# Altium PCB EMG_MainBoard_Layout.PcbDoc (part 2 of 7)
Units mm, origin at the board's own origin, x right, y up, seen from the top; angles counter-clockwise.
Board outline 59.1 x 36 mm, 6 copper layers (L1 TOP, L2 GND, L3 SIGNAL, L4 GND, L5 POWER SIGNAL, L6 BOTTOM), stack 1.146 mm thick; 231 components, 136 nets, 812 pads, 470 vias.
Unrouted connection lines stored in the file: 570.
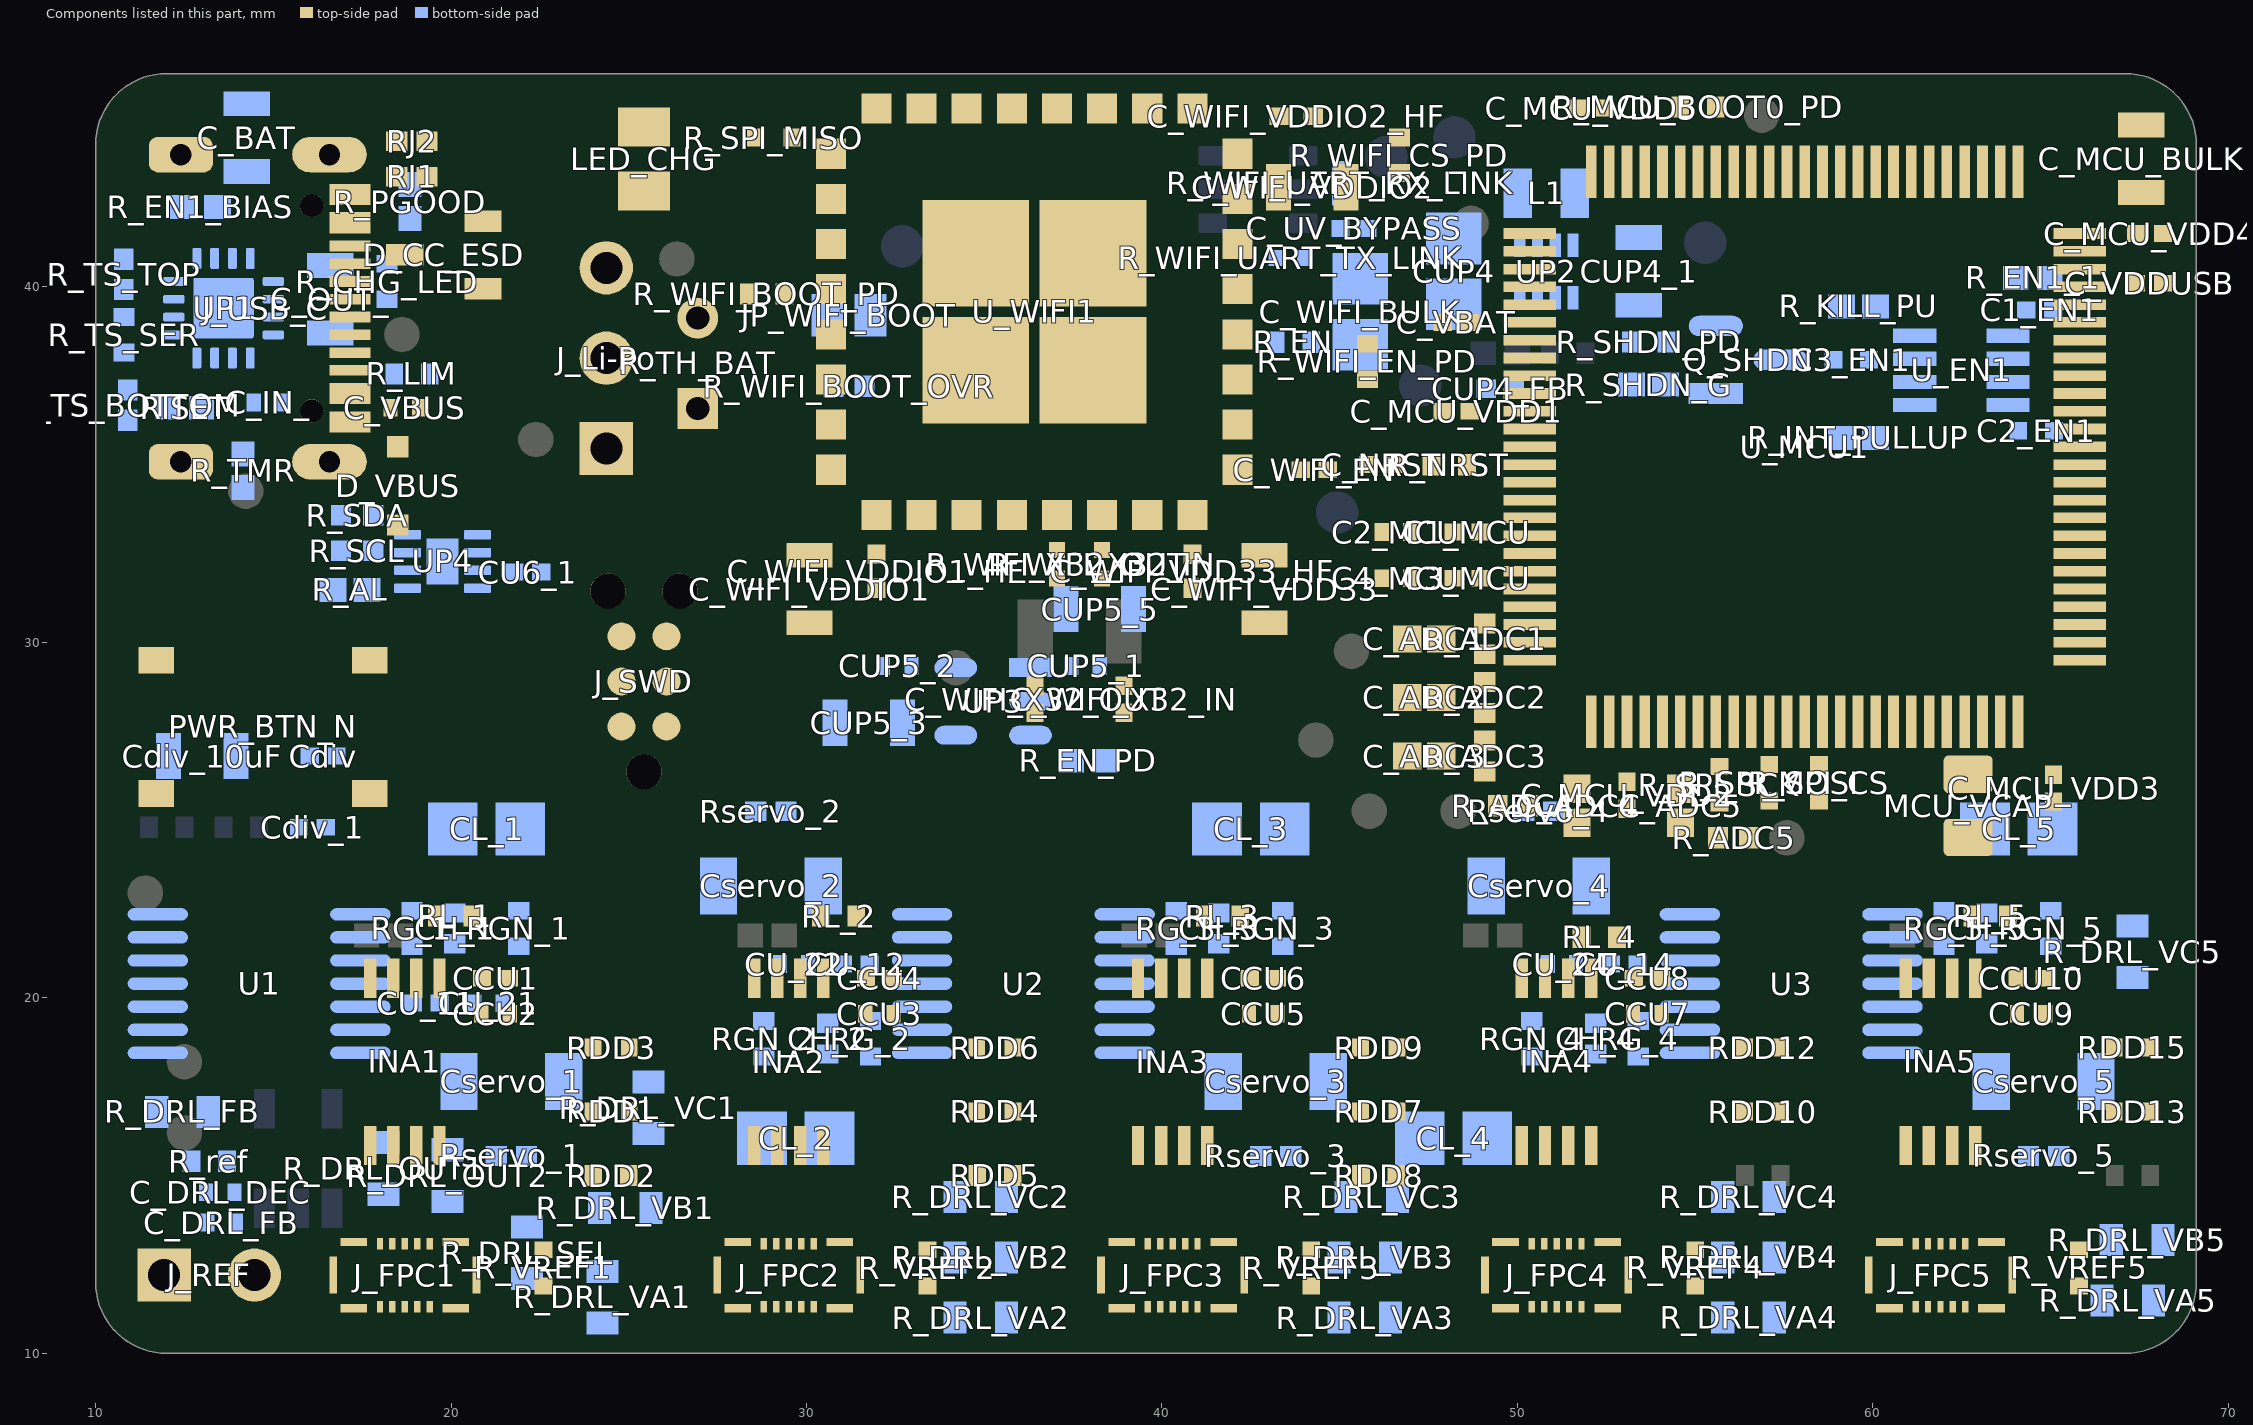
[diagram p6: the components of this part, seen from the top]

## Footprints (in the part's own frame and the unit in brackets; to place one, negate y for a bottom-side part, rotate by r counter-clockwise, add the part's x,y. Pads: shape width x height; smd on the part's side, far side on the other; paste and mask are expansions set on the pad) (continued)
FP-CRCW0402-e3-IPC_B [mm]
  rect 0.568x0.572 smd paste+0 mask+0: 1(-0.452,0) 2(0.452,0)
  body extent -0.5,-0.25 0.5,0.25, height 0.4
FP-DBV0005A-IPC_C [mm]
  rect 1.205x0.532 smd paste+0 mask+0: 1(-1.05,0.95)
  rrect100% 1.205x0.532 smd paste+0 mask+0: 2(-1.05,0) 3(-1.05,-0.95) 4(1.05,-0.95) 5(1.05,0.95)
  silkscreen extent -1.14,-1.45 0.05,2.03, body extent -1.4,-1.45 1.4,1.45, height 1.45
FP-DFE21CC_EL-MFG [mm]
  rect 0.8x1.4 smd paste+0 mask+0: 1(0.8,0) 2(-0.8,0)
  silkscreen extent 0,-0.7 0,0.7, body extent -1,-0.6 1,0.6, height 0.8
FP-GCM21B-0_2-e0_2_0_7-MFG [mm]
  rect 0.7x1.3 smd paste+0 mask+0: 1(-0.95,0) 2(0.95,0)
  silkscreen extent -0.23,-0.72 0.23,-0.72, body extent -1,-0.63 1,0.63, height 1.45
FP-GRM155-0_05-IPC_C [mm]
  rect 0.515x0.472 smd paste+0 mask+0: 1(-0.379,0) 2(0.379,0)
  body extent -0.5,-0.25 0.5,0.25, height 0.55
FP-GRM155-0_05-MFG [mm]
  rect 0.55x0.5 smd paste+0 mask+0: 1(-0.475,0) 2(0.475,0)
  silkscreen extent -0.5,-0.65 0.5,0.65, body extent -0.85,-0.38 0.85,0.38, height 0.25
FP-GRM155-0_15-IPC_A [mm]
  rect 0.804x0.758 smd paste+0 mask+0: 1(-0.477,0) 2(0.477,0)
  silkscreen extent -0.88,-0.78 0.88,0.78, body extent -1.08,-0.58 1.08,0.58, height 0.25
FP-GRM219-0_2-0_1-IPC_A [mm]
  rect 1.455x1.556 smd paste+0 mask+0: 1(-0.926,0) 2(0.926,0)
  silkscreen extent -1.65,-1.18 1.65,1.18, body extent -1,-0.63 1,0.63, height 0.95
FP-RC0402-0_4-IPC_A [mm]
  rect 0.715x0.672 smd paste+0 mask+0: 1(-0.479,0) 2(0.479,0)
  body extent -0.5,-0.25 0.5,0.25, height 0.4
FP-RT0402-MFG [mm]
  rect 0.5x0.6 smd paste+0 mask+0: 1(-0.5,0) 2(0.5,0)
  silkscreen extent -0.5,-0.71 0.5,0.7, body extent -0.85,-0.4 0.85,0.4, height 0.25
FP-SOD323-CA-MFG [mm]
  rect 0.6x0.6 smd paste-1000 mask+0: 1(-1.1,0) 2(1.1,0)
  silkscreen extent -0.43,-0.67 0.43,-0.67, body extent -1.53,-0.82 1.53,0.82, height 0.25
GCT_USB4105-GF-A-060 [mm]
  rect 0.6x1.15 smd mask+0.02: A1_B12(-3.2,4.755) B1_A12(3.2,4.755)
  rect 0.6x1.15 smd mask+0.04: A4_B9(-2.4,4.755) B4_A9(2.4,4.755)
  rect 0.3x1.15 smd mask+0.04: A5(-1.25,4.755) A6(-0.25,4.755) A7(0.25,4.755) A8(1.25,4.755) B5(1.75,4.755) B6(0.75,4.755) B7(-0.75,4.755) B8(-1.75,4.755)
  oval 1x2.1 hole 0.6 slot 1.7 at 90 deg: SH1(-4.32,4.18) SH2(4.32,4.18)
  rrect50% 1x1.8 hole 0.6 slot 1.4 at 90 deg: SH3(-4.32,0) SH4(4.32,0)
  round 0.65 hole 0.65 unplated: ""(-2.89,3.68) ""(2.89,3.68)
  silkscreen extent -4.47,1.4 4.47,2.65, body extent -4.47,-2.6 4.47,5.11, height 3.31
GRM31x [mm] "Murata GRM31CR71E335KA88L 3.3uF 25V X7R 1206; maximum component height 1.8mm; existing lands unchanged"
  rect 1.05x1.6 smd: 1(-1.475,0) 2(1.475,0)
  body extent -1.6,-0.8 1.6,0.8, height 1
HDR1X2 [mm] "Connector; Header; 2 Position"
  rect 1.5x1.5 hole 0.9: 1(0,0)
  round 1.5 hole 0.9: 2(2.54,0)
  silkscreen extent -1.27,-1.27 3.81,1.27
HDR1X3 [mm] "Connector; Header; 3 Position"
  rect 1.5x1.5 hole 0.9: 1(0,0)
  round 1.5 hole 0.9: 2(2.54,0) 3(5.08,0)
  silkscreen extent -1.27,-1.27 6.35,1.27
HIROSE_BK13C06-10DS/2-0.35V(895) [mm]
  rect 0.18x0.325 smd paste+0 mask+0.025: 1(-0.7,0.887) 2(-0.35,0.887) 3(0,0.887) 4(0.35,0.887) 5(0.7,0.887) 6(-0.7,-0.887) 7(-0.35,-0.887) 8(0,-0.887) 9(0.35,-0.887) 10(0.7,-0.887)
  rect 0.75x0.235 smd paste+0 mask+0.09: P1_1(-1.435,0.933) P1_3(-1.435,-0.933) P2_1(1.435,0.933) P2_3(1.435,-0.933)
  rect 0.215x1.04 smd paste+0 mask+0.09: P1_2(-2.015,0) P2_2(2.015,0)
  Keep-Out Layer region: 1.907,-0.815 0.79,-0.815 0.79,-0.725 -0.79,-0.725 -0.79,-0.815 -1.907,-0.815 -1.907,0.815 -0.79,0.815 -0.79,0.725 0.79,0.725 0.79,0.815 1.907,0.815
  silkscreen extent -0.78,1.5 -0.61,1.67
LEDC2012X120N [mm]
  rect 1.1x1.45 smd: A(0.9,0) C(-0.9,0)
  silkscreen extent -2.1,-0.1 -1.9,0.1, body extent -1,-0.65 1,0.65, height 0.9
LT-TS8-8-TSOT-23_V [mm] "SOT23, 8-Leads, Body 2.9x1.75mm, Pitch 0.65mm"
  rect 1.22x0.4 smd: 1(-1.31,0.975) 2(-1.31,0.325) 3(-1.31,-0.325) 4(-1.31,-0.975) 5(1.31,-0.975) 6(1.31,-0.325) 7(1.31,0.325) 8(1.31,0.975)
  silkscreen extent -2.6,-1.45 0.3,1.45, body extent -0.87,-1.45 0.88,1.45, height 1
QFP50P1600X1600X160-100N [mm]
  rect 1.475x0.3 smd mask+0.04: 1(-7.738,6) 2(-7.738,5.5) 3(-7.738,5) 4(-7.738,4.5) 5(-7.738,4) 6(-7.738,3.5) 7(-7.738,3) 8(-7.738,2.5) 9(-7.738,2) 10(-7.738,1.5) 11(-7.738,1) 12(-7.738,0.5) 13(-7.738,0) 14(-7.738,-0.5) 15(-7.738,-1) 16(-7.738,-1.5) 17(-7.738,-2) 18(-7.738,-2.5) 19(-7.738,-3) 20(-7.738,-3.5) 21(-7.738,-4) 22(-7.738,-4.5) 23(-7.738,-5) 24(-7.738,-5.5) 25(-7.738,-6) 51(7.738,-6) 52(7.738,-5.5) 53(7.738,-5) 54(7.738,-4.5) 55(7.738,-4) 56(7.738,-3.5) 57(7.738,-3) 58(7.738,-2.5) 59(7.738,-2) 60(7.738,-1.5) 61(7.738,-1) 62(7.738,-0.5) 63(7.738,0) 64(7.738,0.5) 65(7.738,1) 66(7.738,1.5) 67(7.738,2) 68(7.738,2.5) 69(7.738,3) 70(7.738,3.5) 71(7.738,4) 72(7.738,4.5) 73(7.738,5) 74(7.738,5.5) 75(7.738,6)
  rect 0.3x1.475 smd mask+0.04: 26(-6,-7.738) 27(-5.5,-7.738) 28(-5,-7.738) 29(-4.5,-7.738) 30(-4,-7.738) 31(-3.5,-7.738) 32(-3,-7.738) 33(-2.5,-7.738) 34(-2,-7.738) 35(-1.5,-7.738) 36(-1,-7.738) 37(-0.5,-7.738) 38(0,-7.738) 39(0.5,-7.738) 40(1,-7.738) 41(1.5,-7.738) 42(2,-7.738) 43(2.5,-7.738) 44(3,-7.738) 45(3.5,-7.738) 46(4,-7.738) 47(4.5,-7.738) 48(5,-7.738) 49(5.5,-7.738) 50(6,-7.738) 76(6,7.738) 77(5.5,7.738) 78(5,7.738) 79(4.5,7.738) 80(4,7.738) 81(3.5,7.738) 82(3,7.738) 83(2.5,7.738) 84(2,7.738) 85(1.5,7.738) 86(1,7.738) 87(0.5,7.738) 88(0,7.738) 89(-0.5,7.738) 90(-1,7.738) 91(-1.5,7.738) 92(-2,7.738) 93(-2.5,7.738) 94(-3,7.738) 95(-3.5,7.738) 96(-4,7.738) 97(-4.5,7.738) 98(-5,7.738) 99(-5.5,7.738) 100(-6,7.738)
  silkscreen extent -8.35,6.63 -8.1,6.87, body extent -8.1,-8.1 8.1,8.1, height 1.6
RES_ERA2AEB680X [mm]
  rect 0.475x0.5 smd: 1(-0.512,0) 2(0.512,0)
RES_ERA2ARB103X [mm]
  rect 0.475x0.5 smd: 1(-0.512,0) 2(0.512,0)
RES_ERJ2RKF22R0X [mm]
  rect 0.475x0.5 smd: 1(-0.512,0) 2(0.512,0)
  body extent -0.5,-0.25 0.5,0.25, height 0.35
RESC1005X40N [mm]
  rect 0.56x0.6 smd: 1(-0.435,0) 2(0.435,0)
  body extent -0.5,-0.25 0.5,0.25, height 0.35
RESC1005X40X25LL05T05 [mm] "Chip Resistor, 2-Leads, Body 1.05x0.55mm, IPC High Density"
  rect 0.45x0.45 smd: 1(-0.4,0) 2(0.4,0)
  body extent -0.53,-0.28 0.53,0.28, height 0.4
RESC1005X40X25ML05T10 [mm] "Chip Resistor, 2-Leads, Body 1.00x0.50mm, IPC Low Density"
  rect 0.7x0.65 smd: 1(-0.475,0) 2(0.475,0)
  body extent -0.53,-0.27 0.53,0.28, height 0.4
RESC1005X40X25NL05T10 [mm] "Chip Resistor, 2-Leads, Body 1.00x0.50mm, IPC Medium Density"
  rect 0.6x0.55 smd: 1(-0.425,0) 2(0.425,0)
  body extent -0.53,-0.27 0.53,0.28, height 0.4
RGT0016C_V [mm] "QFN, 16-Leads, Body 3x3mm, Pitch 0.5mm, Thermal Pad 1.65x1.65mm"
  rrect40% 0.6x0.25 smd mask+0.07: 1(-1.4,0.75) 2(-1.4,0.25) 3(-1.4,-0.25) 4(-1.4,-0.75) 9(1.4,-0.75) 10(1.4,-0.25) 11(1.4,0.25) 12(1.4,0.75)
  rrect40% 0.25x0.6 smd mask+0.07: 5(-0.75,-1.4) 6(-0.25,-1.4) 7(0.25,-1.4) 8(0.75,-1.4) 13(0.75,1.4) 14(0.25,1.4) 15(-0.25,1.4) 16(-0.75,1.4)
  rrect6% 1.55x1.55 on Bottom Paste: 17(0,0)
  rrect6% 1.7x1.7 smd paste-0.85 mask+0.07: 17(0,0)
  silkscreen extent -1.58,-1.57 1.57,2.43, body extent -1.5,-1.5 1.5,1.5, height 1
SON50P200X200X80-9N [mm]
  rrect25% 0.76x0.27 smd mask+0.02: 1(-0.985,0.75) 2(-0.985,0.25) 3(-0.985,-0.25) 4(-0.985,-0.75) 5(0.985,-0.75) 6(0.985,-0.25) 7(0.985,0.25) 8(0.985,0.75)
  rect 0.9x1.3 smd paste-2 mask+0.02: 9(0,0)
  silkscreen extent -2.04,0.65 1.05,1.2, body extent -1,-1 1,1, height 0.8
SOT50P160X60-8N [mm]
  rect 0.66x0.32 smd mask+0.035: 1(-0.735,0.75) 2(-0.735,0.25) 3(-0.735,-0.25) 4(-0.735,-0.75) 5(0.735,-0.75) 6(0.735,-0.25) 7(0.735,0.25) 8(0.735,0.75)
  silkscreen extent -3.52,-1.05 0.09,1.05, body extent -0.8,-1.05 0.8,1.05, height 0.6
SOT95P230X100-3N [mm]
  rect 1.05x0.6 smd: 1(-1.1,0.95) 2(-1.1,-0.95) 3(1.1,0)
  silkscreen extent -0.23,-1.45 0.23,1.45, body extent -1.2,-1.45 1.2,1.45, height 0.95
ST67W611M1A6BTR [mm]
  rect 0.847x0.847 smd: 1(-5.386,1.945) 2(-5.386,0.675) 3(-5.386,-0.595) 4(-5.386,-1.865) 5(-5.386,-3.135) 6(-5.386,-4.405) 7(-5.386,-5.675) 8(-5.386,-6.945) 9(-4.115,-8.216) 10(-2.845,-8.216) 11(-1.575,-8.216) 12(-0.305,-8.216) 13(0.965,-8.216) 14(2.235,-8.216) 15(3.505,-8.216) 16(4.775,-8.216) 17(6.046,-6.945) 18(6.046,-5.675) 19(6.046,-4.405) 20(6.046,-3.135) 21(6.046,-1.865) 22(6.046,-0.595) 23(6.046,0.675) 24(6.046,1.945) 25(4.775,3.216) 26(3.505,3.216) 27(2.235,3.216) 28(0.965,3.216) 29(-0.305,3.216) 30(-1.575,3.216) 31(-2.845,3.216) 32(-4.115,3.216)
  rect 3x3 smd: 33(-1.32,-4.15) 34(1.98,-4.15) 35(1.98,-0.85) 36(-1.32,-0.85)
  body extent -5.85,-8.64 6.43,8.64, height 2.4
SW_TS-1187A-B-A-B [mm]
  rect 1x0.75 smd: A(-3,1.875) B(3,1.875) C(-3,-1.875) D(3,-1.875)
  silkscreen extent -2.55,-1.18 2.55,2.55
TSSOP-ST14_N [mm] "TSOP, 14-Leads, Body 5x4.4mm, Pitch 0.65mm, IPC Medium Density"
  oval 1.7x0.35 smd: 1(-2.85,1.95) 2(-2.85,1.3) 3(-2.85,0.65) 4(-2.85,0) 5(-2.85,-0.65) 6(-2.85,-1.3) 7(-2.85,-1.95) 8(2.85,-1.95) 9(2.85,-1.3) 10(2.85,-0.65) 11(2.85,0) 12(2.85,0.65) 13(2.85,1.3) 14(2.85,1.95)
  silkscreen extent -2.98,-2.55 1.6,2.8, body extent -2.25,-2.55 2.25,2.55, height 1.2

## Part data
C1_EN1: library part EMG_R5_C1_EN1, "CAP CER 0.1UF 16V X5R 0402", Capacitance=100nF, Case Code (Imperial)=0402, Case Code (Metric)=1005, Dielectric=X5R, Max Operating Temperature=85°C, Min Operating Temperature=-55°C, Package Quantity=1, Tolerance=10%, Voltage=16V, Case/Package=0402, Construction=Flat, Controlled Revision="R5 2026-09-16; project-local frozen symbol/footprint", Depth=0.5mm, Height=0.5mm, Lead Free="Lead Free", Length=1mm, Mount="Surface Mount", Packaging="Tape and Reel", Radiation Hardening=No, REACH SVHC="No SVHC", RoHS Compliant=Yes, Series=GRM, Size=0.5mm, Termination=SMD/SMT, Thickness=0.022inch, Voltage Rating=16V, Voltage Rating (DC)=16V, Width=0.02inch
C1_MCU: library part EMG_R5_C1_MCU, "CAP CER 0.1UF 16V X5R 0402", Capacitance=100nF, Case Code (Imperial)=0402, Case Code (Metric)=1005, Dielectric=X5R, Max Operating Temperature=85°C, Min Operating Temperature=-55°C, Package Quantity=1, Tolerance=10%, Voltage=16V, Case/Package=0402, Construction=Flat, Controlled Revision="R5 2026-09-16; project-local frozen symbol/footprint", Depth=0.5mm, Height=0.5mm, Lead Free="Lead Free", Length=1mm, Mount="Surface Mount", Packaging="Tape and Reel", Radiation Hardening=No, REACH SVHC="No SVHC", RoHS Compliant=Yes, Series=GRM, Size=0.5mm, Termination=SMD/SMT, Thickness=0.022inch, Voltage Rating=16V, Voltage Rating (DC)=16V, Width=0.02inch
C2_EN1: library part EMG_R5_C2_EN1, "CAP CER 0.033UF 16V X7R 0402", Capacitance="33 nF", Manufacturer=YAGEO, Package=CC0402, Temperature="-55°C to +125°C", Temperature Characteristic=X7R, Temperature Coefficient=30ppm/°C, Temperature Range High=+125°C, Temperature Range Low=-55°C, Tolerance=0.1, Voltage Rating="16 V", Automotive=No, Automotive Grade=NA, Category=Cap, ComponentLink2Description=Datasheet, ComponentLink2URL=http://www.yageo.com/documents/recent/UPY-GP_NP0_16V-to-50V_16.pdf, Controlled Revision="R5 2026-09-16; project-local frozen symbol/footprint", Device Class L1="Passive Components", Device Class L2=Capacitors, Device Class L3="Ceramic Capacitors", Digikey Description="CAP CER 0.033UF 16V X7R 0402", Footprint Url=http://www.yageo.com/exep/pages/download/literatures/UPY-C_GEN_24.pdf, Height=0.55mm, Ipc Land Pattern Name=CAPC10050X50, Lead Free=Yes, Manufacturer Part Number=CC0402KRX7R7BB333, Material=Ceramic, Mouser Description="Multilayer Ceramic Capacitors MLCC - SMD/SMT 33nF 16V X7R 10%", Octopart=https://octopart.com/cc0402krx7r7bb333-yageo-9289202, RoHS=TRUE
C2_MCU: library part EMG_R5_C2_MCU, "Murata GRM155C71C105KE11D: 1 uF 16 V X7S +/-10%, 0402/1005 metric", Capacitance="1 uF", Dielectric=X7S, Manufacturer=Murata, Manufacturer Part Number=GRM155C71C105KE11D, Package="0402 / 1005 metric", Tolerance=+/-10%, Voltage Rating="16 V", Check_prices=https://www.snapeda.com/parts/GRM155C71C105KE11D/Murata/view-part/?ref=eda, Controlled Revision="R5 2026-09-16; project-local frozen symbol/footprint", MF=Murata, MP=GRM155C71C105KE11D, SnapEDA_Link=https://www.snapeda.com/parts/GRM155C71C105KE11D/Murata/view-part/?ref=snap
C3_EN1: library part EMG_R5_C3_EN1, "CAP CER 0.33UF 10V X5R 0402", Capacitance="330 nF", Manufacturer=YAGEO, Package=CC0402, Temperature="-55°C to +125°C", Temperature Characteristic=X5R, Temperature Coefficient=30ppm/°C, Temperature Range High=+125°C, Temperature Range Low=-55°C, Tolerance=0.1, Voltage Rating="10 V", Automotive=No, Automotive Grade=NA, Category=Cap, ComponentLink2Description=Datasheet, ComponentLink2URL=http://www.yageo.com/documents/recent/UPY-GP_NP0_16V-to-50V_16.pdf, Controlled Revision="R5 2026-09-16; project-local frozen symbol/footprint", Device Class L1="Passive Components", Device Class L2=Capacitors, Device Class L3="Ceramic Capacitors", Digikey Description="CAP CER 0.33UF 10V X5R 0402", Footprint Url=http://www.yageo.com/exep/pages/download/literatures/UPY-C_GEN_24.pdf, Height=0.55mm, Ipc Land Pattern Name=CAPC10050X50, Lead Free=Yes, Manufacturer Part Number=CC0402KRX5R6BB334, Material=Ceramic, Mouser Description="0402 330 nF 10 V ±10 % Tolerance X5R SMT Multilayer Ceramic Capacitor", Octopart=https://octopart.com/cc0402krx5r6bb334-yageo-21548561, RoHS=TRUE
C3_MCU: library part EMG_R5_C3_MCU, "CAP CER 0.1UF 16V X5R 0402", Capacitance=100nF, Case Code (Imperial)=0402, Case Code (Metric)=1005, Dielectric=X5R, Max Operating Temperature=85°C, Min Operating Temperature=-55°C, Package Quantity=1, Tolerance=10%, Voltage=16V, Case/Package=0402, Construction=Flat, Controlled Revision="R5 2026-09-16; project-local frozen symbol/footprint", Depth=0.5mm, Height=0.5mm, Lead Free="Lead Free", Length=1mm, Mount="Surface Mount", Packaging="Tape and Reel", Radiation Hardening=No, REACH SVHC="No SVHC", RoHS Compliant=Yes, Series=GRM, Size=0.5mm, Termination=SMD/SMT, Thickness=0.022inch, Voltage Rating=16V, Voltage Rating (DC)=16V, Width=0.02inch
C4_MCU: library part EMG_R5_C4_MCU, "Murata GRM155C71C105KE11D: 1 uF 16 V X7S +/-10%, 0402/1005 metric", Capacitance="1 uF", Dielectric=X7S, Manufacturer=Murata, Manufacturer Part Number=GRM155C71C105KE11D, Package="0402 / 1005 metric", Tolerance=+/-10%, Voltage Rating="16 V", Check_prices=https://www.snapeda.com/parts/GRM155C71C105KE11D/Murata/view-part/?ref=eda, Controlled Revision="R5 2026-09-16; project-local frozen symbol/footprint", MF=Murata, MP=GRM155C71C105KE11D, SnapEDA_Link=https://www.snapeda.com/parts/GRM155C71C105KE11D/Murata/view-part/?ref=snap
C_ADC1: library part EMG_R5_C_ADC1, "Chip Multilayer Ceramic Capacitors for General Purpose, 0402, 10000pF, C0G, 30ppm/°C, 5%, 25V", Controlled Revision="R5 2026-09-16; project-local frozen symbol/footprint"
C_ADC2: library part EMG_R5_C_ADC2, "Chip Multilayer Ceramic Capacitors for General Purpose, 0402, 10000pF, C0G, 30ppm/°C, 5%, 25V", Controlled Revision="R5 2026-09-16; project-local frozen symbol/footprint"
C_ADC3: library part EMG_R5_C_ADC3, "Chip Multilayer Ceramic Capacitors for General Purpose, 0402, 10000pF, C0G, 30ppm/°C, 5%, 25V", Controlled Revision="R5 2026-09-16; project-local frozen symbol/footprint"
C_ADC4: library part EMG_R5_C_ADC4, "Chip Multilayer Ceramic Capacitors for General Purpose, 0402, 10000pF, C0G, 30ppm/°C, 5%, 25V", Controlled Revision="R5 2026-09-16; project-local frozen symbol/footprint"
C_ADC5: library part EMG_R5_C_ADC5, "Chip Multilayer Ceramic Capacitors for General Purpose, 0402, 10000pF, C0G, 30ppm/°C, 5%, 25V", Controlled Revision="R5 2026-09-16; project-local frozen symbol/footprint"
C_BAT: library part EMG_R5_C_BAT, "10 µF ±10% 25V Ceramic Capacitor X7S 0805 (2012 Metric)", Controlled Revision="R5 2026-09-16; project-local frozen symbol/footprint"
C_DRL_DEC: library part EMG_DRL_C_DRL_DEC, "Optional DRL provision; not fitted in PROTO_1_REMOTE_NTC", Dielectric=X7R, Manufacturer="Murata Manufacturing", Manufacturer Part Number=GRM155R71C104KA88D, Package="0402 / 1005 metric", Tolerance=10%, Voltage Rating=16V, Assembly Variant="PROTO_1_REMOTE_NTC: Not Fitted", Population="DNP - optional DRL", Qualification="DNP prototype provision; populated loop and body-interface qualification required"
C_DRL_FB: library part EMG_DRL_C_DRL_FB, "Optional DRL provision; not fitted in PROTO_1_REMOTE_NTC", Dielectric="C0G / NP0", Manufacturer="Murata Manufacturing", Manufacturer Part Number=GRM1555C1H102JA01D, Package="0402 / 1005 metric", Tolerance=5%, Voltage Rating=50V, Assembly Variant="PROTO_1_REMOTE_NTC: Not Fitted", Population="DNP - optional DRL", Qualification="DNP prototype provision; populated loop and body-interface qualification required"
C_IN_: library part EMG_R5_C_IN_, "Murata GRM155C71C105KE11D: 1 uF 16 V X7S +/-10%, 0402/1005 metric", Capacitance="1 uF", Dielectric=X7S, Manufacturer=Murata, Package="0402 / 1005 metric", Tolerance=+/-10%, Voltage Rating="16 V", Check_prices=https://www.snapeda.com/parts/GRM155C71C105KE11D/Murata/view-part/?ref=eda, Controlled Revision="R5 2026-09-16; project-local frozen symbol/footprint", Manufacturer Part Number=GRM155C71C105KE11D, MF=Murata, MP=GRM155C71C105KE11D, SnapEDA_Link=https://www.snapeda.com/parts/GRM155C71C105KE11D/Murata/view-part/?ref=snap
C_MCU_BULK: library part EMG_R5_C_MCU_BULK, "10 µF ±10% 25V Ceramic Capacitor X7S 0805 (2012 Metric)", Controlled Revision="R5 2026-09-16; project-local frozen symbol/footprint"
C_MCU_VDD1: library part EMG_R5_C_MCU_VDD1, "CAP CER 0.1UF 16V X5R 0402", Capacitance=100nF, Case Code (Imperial)=0402, Case Code (Metric)=1005, Dielectric=X5R, Max Operating Temperature=85°C, Min Operating Temperature=-55°C, Package Quantity=1, Tolerance=10%, Voltage=16V, Case/Package=0402, Construction=Flat, Controlled Revision="R5 2026-09-16; project-local frozen symbol/footprint", Depth=0.5mm, Height=0.5mm, Lead Free="Lead Free", Length=1mm, Mount="Surface Mount", Packaging="Tape and Reel", Radiation Hardening=No, REACH SVHC="No SVHC", RoHS Compliant=Yes, Series=GRM, Size=0.5mm, Termination=SMD/SMT, Thickness=0.022inch, Voltage Rating=16V, Voltage Rating (DC)=16V, Width=0.02inch
C_MCU_VDD2: library part EMG_R5_C_MCU_VDD2, "CAP CER 0.1UF 16V X5R 0402", Capacitance=100nF, Case Code (Imperial)=0402, Case Code (Metric)=1005, Dielectric=X5R, Max Operating Temperature=85°C, Min Operating Temperature=-55°C, Package Quantity=1, Tolerance=10%, Voltage=16V, Case/Package=0402, Construction=Flat, Controlled Revision="R5 2026-09-16; project-local frozen symbol/footprint", Depth=0.5mm, Height=0.5mm, Lead Free="Lead Free", Length=1mm, Mount="Surface Mount", Packaging="Tape and Reel", Radiation Hardening=No, REACH SVHC="No SVHC", RoHS Compliant=Yes, Series=GRM, Size=0.5mm, Termination=SMD/SMT, Thickness=0.022inch, Voltage Rating=16V, Voltage Rating (DC)=16V, Width=0.02inch
C_MCU_VDD3: library part EMG_R5_C_MCU_VDD3, "CAP CER 0.1UF 16V X5R 0402", Capacitance=100nF, Case Code (Imperial)=0402, Case Code (Metric)=1005, Dielectric=X5R, Max Operating Temperature=85°C, Min Operating Temperature=-55°C, Package Quantity=1, Tolerance=10%, Voltage=16V, Case/Package=0402, Construction=Flat, Controlled Revision="R5 2026-09-16; project-local frozen symbol/footprint", Depth=0.5mm, Height=0.5mm, Lead Free="Lead Free", Length=1mm, Mount="Surface Mount", Packaging="Tape and Reel", Radiation Hardening=No, REACH SVHC="No SVHC", RoHS Compliant=Yes, Series=GRM, Size=0.5mm, Termination=SMD/SMT, Thickness=0.022inch, Voltage Rating=16V, Voltage Rating (DC)=16V, Width=0.02inch
C_MCU_VDD4: library part EMG_R5_C_MCU_VDD4, "CAP CER 0.1UF 16V X5R 0402", Capacitance=100nF, Case Code (Imperial)=0402, Case Code (Metric)=1005, Dielectric=X5R, Max Operating Temperature=85°C, Min Operating Temperature=-55°C, Package Quantity=1, Tolerance=10%, Voltage=16V, Case/Package=0402, Construction=Flat, Controlled Revision="R5 2026-09-16; project-local frozen symbol/footprint", Depth=0.5mm, Height=0.5mm, Lead Free="Lead Free", Length=1mm, Mount="Surface Mount", Packaging="Tape and Reel", Radiation Hardening=No, REACH SVHC="No SVHC", RoHS Compliant=Yes, Series=GRM, Size=0.5mm, Termination=SMD/SMT, Thickness=0.022inch, Voltage Rating=16V, Voltage Rating (DC)=16V, Width=0.02inch
C_MCU_VDD5: library part EMG_R5_C_MCU_VDD5, "CAP CER 0.1UF 16V X5R 0402", Capacitance=100nF, Case Code (Imperial)=0402, Case Code (Metric)=1005, Dielectric=X5R, Max Operating Temperature=85°C, Min Operating Temperature=-55°C, Package Quantity=1, Tolerance=10%, Voltage=16V, Case/Package=0402, Construction=Flat, Controlled Revision="R5 2026-09-16; project-local frozen symbol/footprint", Depth=0.5mm, Height=0.5mm, Lead Free="Lead Free", Length=1mm, Mount="Surface Mount", Packaging="Tape and Reel", Radiation Hardening=No, REACH SVHC="No SVHC", RoHS Compliant=Yes, Series=GRM, Size=0.5mm, Termination=SMD/SMT, Thickness=0.022inch, Voltage Rating=16V, Voltage Rating (DC)=16V, Width=0.02inch
C_NRST: library part EMG_R5_C_NRST, "CAP CER 0.1UF 16V X5R 0402", Capacitance=100nF, Case Code (Imperial)=0402, Case Code (Metric)=1005, Dielectric=X5R, Max Operating Temperature=85°C, Min Operating Temperature=-55°C, Package Quantity=1, Tolerance=10%, Voltage=16V, Case/Package=0402, Construction=Flat, Controlled Revision="R5 2026-09-16; project-local frozen symbol/footprint", Depth=0.5mm, Height=0.5mm, Lead Free="Lead Free", Length=1mm, Mount="Surface Mount", Packaging="Tape and Reel", Radiation Hardening=No, REACH SVHC="No SVHC", RoHS Compliant=Yes, Series=GRM, Size=0.5mm, Termination=SMD/SMT, Thickness=0.022inch, Voltage Rating=16V, Voltage Rating (DC)=16V, Width=0.02inch
C_OUT_: library part EMG_R5_C_OUT_, "10 µF ±10% 25V Ceramic Capacitor X7S 0805 (2012 Metric)", Controlled Revision="R5 2026-09-16; project-local frozen symbol/footprint"
C_UV_BYPASS: library part EMG_R5_C_UV_BYPASS, "CAP CER 0.1UF 16V X5R 0402", Capacitance=100nF, Case Code (Imperial)=0402, Case Code (Metric)=1005, Dielectric=X5R, Max Operating Temperature=85°C, Min Operating Temperature=-55°C, Package Quantity=1, Tolerance=10%, Voltage=16V, Case/Package=0402, Construction=Flat, Controlled Revision="R5 2026-09-16; project-local frozen symbol/footprint", Depth=0.5mm, Height=0.5mm, Lead Free="Lead Free", Length=1mm, Mount="Surface Mount", Packaging="Tape and Reel", Radiation Hardening=No, REACH SVHC="No SVHC", RoHS Compliant=Yes, Series=GRM, Size=0.5mm, Termination=SMD/SMT, Thickness=0.022inch, Voltage Rating=16V, Voltage Rating (DC)=16V, Width=0.02inch
C_VBAT: library part EMG_R5_C_VBAT, "CAP CER 0.1UF 16V X5R 0402", Capacitance=100nF, Case Code (Imperial)=0402, Case Code (Metric)=1005, Dielectric=X5R, Max Operating Temperature=85°C, Min Operating Temperature=-55°C, Package Quantity=1, Tolerance=10%, Voltage=16V, Case/Package=0402, Construction=Flat, Controlled Revision="R5 2026-09-16; project-local frozen symbol/footprint", Depth=0.5mm, Height=0.5mm, Lead Free="Lead Free", Length=1mm, Mount="Surface Mount", Packaging="Tape and Reel", Radiation Hardening=No, REACH SVHC="No SVHC", RoHS Compliant=Yes, Series=GRM, Size=0.5mm, Termination=SMD/SMT, Thickness=0.022inch, Voltage Rating=16V, Voltage Rating (DC)=16V, Width=0.02inch
C_VBUS: library part EMG_R5_C_VBUS, "Murata GRM155C71C105KE11D: 1 uF 16 V X7S +/-10%, 0402/1005 metric", Capacitance="1 uF", Dielectric=X7S, Manufacturer=Murata, Package="0402 / 1005 metric", Tolerance=+/-10%, Voltage Rating="16 V", Check_prices=https://www.snapeda.com/parts/GRM155C71C105KE11D/Murata/view-part/?ref=eda, Controlled Revision="R5 2026-09-16; project-local frozen symbol/footprint", Manufacturer Part Number=GRM155C71C105KE11D, MF=Murata, MP=GRM155C71C105KE11D, SnapEDA_Link=https://www.snapeda.com/parts/GRM155C71C105KE11D/Murata/view-part/?ref=snap
C_VDDUSB: library part EMG_R5_C_VDDUSB, "CAP CER 0.1UF 16V X5R 0402", Capacitance=100nF, Case Code (Imperial)=0402, Case Code (Metric)=1005, Dielectric=X5R, Max Operating Temperature=85°C, Min Operating Temperature=-55°C, Package Quantity=1, Tolerance=10%, Voltage=16V, Case/Package=0402, Construction=Flat, Controlled Revision="R5 2026-09-16; project-local frozen symbol/footprint", Depth=0.5mm, Height=0.5mm, Lead Free="Lead Free", Length=1mm, Mount="Surface Mount", Packaging="Tape and Reel", Radiation Hardening=No, REACH SVHC="No SVHC", RoHS Compliant=Yes, Series=GRM, Size=0.5mm, Termination=SMD/SMT, Thickness=0.022inch, Voltage Rating=16V, Voltage Rating (DC)=16V, Width=0.02inch
C_WIFI_BULK: library part EMG_R5_C_WIFI_BULK, "Chip Multilayer Ceramic Capacitors for General Purpose, 0805, 47uF, X5R, 15%, 20%, 6.3V", Capacitance=47uF, Case Code (Imperial)=0805, Case Code (Metric)=2012, Max Operating Temperature=85°C, Min Operating Temperature=-55°C, Tolerance=20%, Voltage Rating=6.3V, Assembly PROTO_1="Not Fitted", Assembly PROTO_1_REMOTE_NTC="Not Fitted", Case/Package=0805, Controlled Revision="R5 2026-09-16; project-local frozen symbol/footprint", Length=0.079inch, Mount="Surface Mount", Packaging="Tape and Reel", Release Note="Optional 47 uF radio bulk; retained footprint, initial prototype DNP", Thickness=0.037inch, Width=0.049inch
C_WIFI_EN: library part EMG_R5_C_WIFI_EN, "CAP CER 0.1UF 16V X5R 0402", Capacitance=100nF, Case Code (Imperial)=0402, Case Code (Metric)=1005, Dielectric=X5R, Max Operating Temperature=85°C, Min Operating Temperature=-55°C, Package Quantity=1, Tolerance=10%, Voltage=16V, Case/Package=0402, Construction=Flat, Controlled Revision="R5 2026-09-16; project-local frozen symbol/footprint", Depth=0.5mm, Height=0.5mm, Lead Free="Lead Free", Length=1mm, Mount="Surface Mount", Packaging="Tape and Reel", Radiation Hardening=No, REACH SVHC="No SVHC", RoHS Compliant=Yes, Series=GRM, Size=0.5mm, Termination=SMD/SMT, Thickness=0.022inch, Voltage Rating=16V, Voltage Rating (DC)=16V, Width=0.02inch
C_WIFI_VDD33: library part EMG_R5_C_WIFI_VDD33, "10 µF ±10% 25V Ceramic Capacitor X7S 0805 (2012 Metric)", Controlled Revision="R5 2026-09-16; project-local frozen symbol/footprint"
C_WIFI_VDD33_HF: library part EMG_R5_C_WIFI_VDD33_HF, "CAP CER 0.1UF 16V X5R 0402", Capacitance=100nF, Case Code (Imperial)=0402, Case Code (Metric)=1005, Dielectric=X5R, Max Operating Temperature=85°C, Min Operating Temperature=-55°C, Package Quantity=1, Tolerance=10%, Voltage=16V, Case/Package=0402, Construction=Flat, Controlled Revision="R5 2026-09-16; project-local frozen symbol/footprint", Depth=0.5mm, Height=0.5mm, Lead Free="Lead Free", Length=1mm, Mount="Surface Mount", Packaging="Tape and Reel", Radiation Hardening=No, REACH SVHC="No SVHC", RoHS Compliant=Yes, Series=GRM, Size=0.5mm, Termination=SMD/SMT, Thickness=0.022inch, Voltage Rating=16V, Voltage Rating (DC)=16V, Width=0.02inch
C_WIFI_VDDIO1: library part EMG_R5_C_WIFI_VDDIO1, "10 µF ±10% 25V Ceramic Capacitor X7S 0805 (2012 Metric)", Controlled Revision="R5 2026-09-16; project-local frozen symbol/footprint"
C_WIFI_VDDIO1_HF: library part EMG_R5_C_WIFI_VDDIO1_HF, "CAP CER 0.1UF 16V X5R 0402", Capacitance=100nF, Case Code (Imperial)=0402, Case Code (Metric)=1005, Dielectric=X5R, Max Operating Temperature=85°C, Min Operating Temperature=-55°C, Package Quantity=1, Tolerance=10%, Voltage=16V, Case/Package=0402, Construction=Flat, Controlled Revision="R5 2026-09-16; project-local frozen symbol/footprint", Depth=0.5mm, Height=0.5mm, Lead Free="Lead Free", Length=1mm, Mount="Surface Mount", Packaging="Tape and Reel", Radiation Hardening=No, REACH SVHC="No SVHC", RoHS Compliant=Yes, Series=GRM, Size=0.5mm, Termination=SMD/SMT, Thickness=0.022inch, Voltage Rating=16V, Voltage Rating (DC)=16V, Width=0.02inch
C_WIFI_VDDIO2: library part EMG_R5_C_WIFI_VDDIO2, "10 µF ±10% 25V Ceramic Capacitor X7S 0805 (2012 Metric)", Controlled Revision="R5 2026-09-16; project-local frozen symbol/footprint"
C_WIFI_VDDIO2_HF: library part EMG_R5_C_WIFI_VDDIO2_HF, "CAP CER 0.1UF 16V X5R 0402", Capacitance=100nF, Case Code (Imperial)=0402, Case Code (Metric)=1005, Dielectric=X5R, Max Operating Temperature=85°C, Min Operating Temperature=-55°C, Package Quantity=1, Tolerance=10%, Voltage=16V, Case/Package=0402, Construction=Flat, Controlled Revision="R5 2026-09-16; project-local frozen symbol/footprint", Depth=0.5mm, Height=0.5mm, Lead Free="Lead Free", Length=1mm, Mount="Surface Mount", Packaging="Tape and Reel", Radiation Hardening=No, REACH SVHC="No SVHC", RoHS Compliant=Yes, Series=GRM, Size=0.5mm, Termination=SMD/SMT, Thickness=0.022inch, Voltage Rating=16V, Voltage Rating (DC)=16V, Width=0.02inch
C_WIFI_X32_IN: library part EMG_R5_C_WIFI_X32_IN, "DNP - 32 kHz crystal tuning capacitor; no fitted value or MPN; retain 0402 footprint", Package="0402 / 1005 metric", Assembly PROTO_1="Not Fitted", Assembly PROTO_1_REMOTE_NTC="Not Fitted", Controlled Revision="R5 2026-09-16; project-local frozen symbol/footprint", Release Note="No fitted capacitance or MPN. Qualify pF tuning if required; never fit copied 100 nF."
C_WIFI_X32_OUT: library part EMG_R5_C_WIFI_X32_OUT, "DNP - 32 kHz crystal tuning capacitor; no fitted value or MPN; retain 0402 footprint", Package="0402 / 1005 metric", Assembly PROTO_1="Not Fitted", Assembly PROTO_1_REMOTE_NTC="Not Fitted", Controlled Revision="R5 2026-09-16; project-local frozen symbol/footprint", Release Note="No fitted capacitance or MPN. Qualify pF tuning if required; never fit copied 100 nF."
CCU1: library part EMG_R5_CCU1, "CAP CER 0.1UF 16V X5R 0402", Capacitance=100nF, Case Code (Imperial)=0402, Case Code (Metric)=1005, Dielectric=X5R, Max Operating Temperature=85°C, Min Operating Temperature=-55°C, Package Quantity=1, Tolerance=10%, Voltage=16V, Case/Package=0402, Construction=Flat, Controlled Revision="R5 2026-09-16; project-local frozen symbol/footprint", Depth=0.5mm, Height=0.5mm, Lead Free="Lead Free", Length=1mm, Mount="Surface Mount", Packaging="Tape and Reel", Radiation Hardening=No, REACH SVHC="No SVHC", RoHS Compliant=Yes, Series=GRM, Size=0.5mm, Termination=SMD/SMT, Thickness=0.022inch, Voltage Rating=16V, Voltage Rating (DC)=16V, Width=0.02inch
CCU2: library part EMG_R5_CCU2, "Murata GRM155C71C105KE11D: 1 uF 16 V X7S +/-10%, 0402/1005 metric", Capacitance="1 uF", Dielectric=X7S, Manufacturer=Murata, Manufacturer Part Number=GRM155C71C105KE11D, Package="0402 / 1005 metric", Tolerance=+/-10%, Voltage Rating="16 V", Check_prices=https://www.snapeda.com/parts/GRM155C71C105KE11D/Murata/view-part/?ref=eda, Controlled Revision="R5 2026-09-16; project-local frozen symbol/footprint", MF=Murata, MP=GRM155C71C105KE11D, SnapEDA_Link=https://www.snapeda.com/parts/GRM155C71C105KE11D/Murata/view-part/?ref=snap
CCU3: library part EMG_R5_CCU3, "Murata GRM155C71C105KE11D: 1 uF 16 V X7S +/-10%, 0402/1005 metric", Capacitance="1 uF", Dielectric=X7S, Manufacturer=Murata, Manufacturer Part Number=GRM155C71C105KE11D, Package="0402 / 1005 metric", Tolerance=+/-10%, Voltage Rating="16 V", Check_prices=https://www.snapeda.com/parts/GRM155C71C105KE11D/Murata/view-part/?ref=eda, Controlled Revision="R5 2026-09-16; project-local frozen symbol/footprint", MF=Murata, MP=GRM155C71C105KE11D, SnapEDA_Link=https://www.snapeda.com/parts/GRM155C71C105KE11D/Murata/view-part/?ref=snap
CCU4: library part EMG_R5_CCU4, "CAP CER 0.1UF 16V X5R 0402", Capacitance=100nF, Case Code (Imperial)=0402, Case Code (Metric)=1005, Dielectric=X5R, Max Operating Temperature=85°C, Min Operating Temperature=-55°C, Package Quantity=1, Tolerance=10%, Voltage=16V, Case/Package=0402, Construction=Flat, Controlled Revision="R5 2026-09-16; project-local frozen symbol/footprint", Depth=0.5mm, Height=0.5mm, Lead Free="Lead Free", Length=1mm, Mount="Surface Mount", Packaging="Tape and Reel", Radiation Hardening=No, REACH SVHC="No SVHC", RoHS Compliant=Yes, Series=GRM, Size=0.5mm, Termination=SMD/SMT, Thickness=0.022inch, Voltage Rating=16V, Voltage Rating (DC)=16V, Width=0.02inch
CCU5: library part EMG_R5_CCU5, "Murata GRM155C71C105KE11D: 1 uF 16 V X7S +/-10%, 0402/1005 metric", Capacitance="1 uF", Dielectric=X7S, Manufacturer=Murata, Manufacturer Part Number=GRM155C71C105KE11D, Package="0402 / 1005 metric", Tolerance=+/-10%, Voltage Rating="16 V", Check_prices=https://www.snapeda.com/parts/GRM155C71C105KE11D/Murata/view-part/?ref=eda, Controlled Revision="R5 2026-09-16; project-local frozen symbol/footprint", MF=Murata, MP=GRM155C71C105KE11D, SnapEDA_Link=https://www.snapeda.com/parts/GRM155C71C105KE11D/Murata/view-part/?ref=snap
CCU6: library part EMG_R5_CCU6, "CAP CER 0.1UF 16V X5R 0402", Capacitance=100nF, Case Code (Imperial)=0402, Case Code (Metric)=1005, Dielectric=X5R, Max Operating Temperature=85°C, Min Operating Temperature=-55°C, Package Quantity=1, Tolerance=10%, Voltage=16V, Case/Package=0402, Construction=Flat, Controlled Revision="R5 2026-09-16; project-local frozen symbol/footprint", Depth=0.5mm, Height=0.5mm, Lead Free="Lead Free", Length=1mm, Mount="Surface Mount", Packaging="Tape and Reel", Radiation Hardening=No, REACH SVHC="No SVHC", RoHS Compliant=Yes, Series=GRM, Size=0.5mm, Termination=SMD/SMT, Thickness=0.022inch, Voltage Rating=16V, Voltage Rating (DC)=16V, Width=0.02inch
CCU7: library part EMG_R5_CCU7, "Murata GRM155C71C105KE11D: 1 uF 16 V X7S +/-10%, 0402/1005 metric", Capacitance="1 uF", Dielectric=X7S, Manufacturer=Murata, Manufacturer Part Number=GRM155C71C105KE11D, Package="0402 / 1005 metric", Tolerance=+/-10%, Voltage Rating="16 V", Check_prices=https://www.snapeda.com/parts/GRM155C71C105KE11D/Murata/view-part/?ref=eda, Controlled Revision="R5 2026-09-16; project-local frozen symbol/footprint", MF=Murata, MP=GRM155C71C105KE11D, SnapEDA_Link=https://www.snapeda.com/parts/GRM155C71C105KE11D/Murata/view-part/?ref=snap
CCU8: library part EMG_R5_CCU8, "CAP CER 0.1UF 16V X5R 0402", Capacitance=100nF, Case Code (Imperial)=0402, Case Code (Metric)=1005, Dielectric=X5R, Max Operating Temperature=85°C, Min Operating Temperature=-55°C, Package Quantity=1, Tolerance=10%, Voltage=16V, Case/Package=0402, Construction=Flat, Controlled Revision="R5 2026-09-16; project-local frozen symbol/footprint", Depth=0.5mm, Height=0.5mm, Lead Free="Lead Free", Length=1mm, Mount="Surface Mount", Packaging="Tape and Reel", Radiation Hardening=No, REACH SVHC="No SVHC", RoHS Compliant=Yes, Series=GRM, Size=0.5mm, Termination=SMD/SMT, Thickness=0.022inch, Voltage Rating=16V, Voltage Rating (DC)=16V, Width=0.02inch
CCU9: library part EMG_R5_CCU9, "Murata GRM155C71C105KE11D: 1 uF 16 V X7S +/-10%, 0402/1005 metric", Capacitance="1 uF", Dielectric=X7S, Manufacturer=Murata, Manufacturer Part Number=GRM155C71C105KE11D, Package="0402 / 1005 metric", Tolerance=+/-10%, Voltage Rating="16 V", Check_prices=https://www.snapeda.com/parts/GRM155C71C105KE11D/Murata/view-part/?ref=eda, Controlled Revision="R5 2026-09-16; project-local frozen symbol/footprint", MF=Murata, MP=GRM155C71C105KE11D, SnapEDA_Link=https://www.snapeda.com/parts/GRM155C71C105KE11D/Murata/view-part/?ref=snap
CCU10: library part EMG_R5_CCU10, "CAP CER 0.1UF 16V X5R 0402", Capacitance=100nF, Case Code (Imperial)=0402, Case Code (Metric)=1005, Dielectric=X5R, Max Operating Temperature=85°C, Min Operating Temperature=-55°C, Package Quantity=1, Tolerance=10%, Voltage=16V, Case/Package=0402, Construction=Flat, Controlled Revision="R5 2026-09-16; project-local frozen symbol/footprint", Depth=0.5mm, Height=0.5mm, Lead Free="Lead Free", Length=1mm, Mount="Surface Mount", Packaging="Tape and Reel", Radiation Hardening=No, REACH SVHC="No SVHC", RoHS Compliant=Yes, Series=GRM, Size=0.5mm, Termination=SMD/SMT, Thickness=0.022inch, Voltage Rating=16V, Voltage Rating (DC)=16V, Width=0.02inch
Cdiv: library part EMG_R5_Cdiv, "CAP CER 0.1UF 16V X5R 0402", Capacitance=100nF, Case Code (Imperial)=0402, Case Code (Metric)=1005, Dielectric=X5R, Max Operating Temperature=85°C, Min Operating Temperature=-55°C, Package Quantity=1, Tolerance=10%, Voltage=16V, Case/Package=0402, Construction=Flat, Controlled Revision="R5 2026-09-16; project-local frozen symbol/footprint", Depth=0.5mm, Height=0.5mm, Lead Free="Lead Free", Length=1mm, Mount="Surface Mount", Packaging="Tape and Reel", Radiation Hardening=No, REACH SVHC="No SVHC", RoHS Compliant=Yes, Series=GRM, Size=0.5mm, Termination=SMD/SMT, Thickness=0.022inch, Voltage Rating=16V, Voltage Rating (DC)=16V, Width=0.02inch
Cdiv_1: library part EMG_R5_Cdiv_1, "CAP CER 0.1UF 16V X5R 0402", Capacitance=100nF, Case Code (Imperial)=0402, Case Code (Metric)=1005, Dielectric=X5R, Max Operating Temperature=85°C, Min Operating Temperature=-55°C, Package Quantity=1, Tolerance=10%, Voltage=16V, Case/Package=0402, Construction=Flat, Controlled Revision="R5 2026-09-16; project-local frozen symbol/footprint", Depth=0.5mm, Height=0.5mm, Lead Free="Lead Free", Length=1mm, Mount="Surface Mount", Packaging="Tape and Reel", Radiation Hardening=No, REACH SVHC="No SVHC", RoHS Compliant=Yes, Series=GRM, Size=0.5mm, Termination=SMD/SMT, Thickness=0.022inch, Voltage Rating=16V, Voltage Rating (DC)=16V, Width=0.02inch
Cdiv_10uF: library part EMG_R5_Cdiv_10uF, "10 µF ±10% 25V Ceramic Capacitor X7S 0805 (2012 Metric)", Controlled Revision="R5 2026-09-16; project-local frozen symbol/footprint"
CH_1: library part EMG_R5_CH_1, "SMD capacitor C0G(EIA) with capacitance 3900pF Tol.2%. Rated voltage 50Vdc 125C", Package="1005-2 Murata", Check_prices=https://www.snapeda.com/parts/GRM1555C1H392GE01D/Murata/view-part/?ref=eda, Controlled Revision="R5 2026-09-16; project-local frozen symbol/footprint", MF="Murata Electronics", MP=GRM1555C1H392GE01D, SnapEDA_Link=https://www.snapeda.com/parts/GRM1555C1H392GE01D/Murata/view-part/?ref=snap
CH_2: library part EMG_R5_CH_2, "SMD capacitor C0G(EIA) with capacitance 3900pF Tol.2%. Rated voltage 50Vdc 125C", Package="1005-2 Murata", Check_prices=https://www.snapeda.com/parts/GRM1555C1H392GE01D/Murata/view-part/?ref=eda, Controlled Revision="R5 2026-09-16; project-local frozen symbol/footprint", MF="Murata Electronics", MP=GRM1555C1H392GE01D, SnapEDA_Link=https://www.snapeda.com/parts/GRM1555C1H392GE01D/Murata/view-part/?ref=snap
CH_3: library part EMG_R5_CH_3, "SMD capacitor C0G(EIA) with capacitance 3900pF Tol.2%. Rated voltage 50Vdc 125C", Package="1005-2 Murata", Check_prices=https://www.snapeda.com/parts/GRM1555C1H392GE01D/Murata/view-part/?ref=eda, Controlled Revision="R5 2026-09-16; project-local frozen symbol/footprint", MF="Murata Electronics", MP=GRM1555C1H392GE01D, SnapEDA_Link=https://www.snapeda.com/parts/GRM1555C1H392GE01D/Murata/view-part/?ref=snap
CH_4: library part EMG_R5_CH_4, "SMD capacitor C0G(EIA) with capacitance 3900pF Tol.2%. Rated voltage 50Vdc 125C", Package="1005-2 Murata", Check_prices=https://www.snapeda.com/parts/GRM1555C1H392GE01D/Murata/view-part/?ref=eda, Controlled Revision="R5 2026-09-16; project-local frozen symbol/footprint", MF="Murata Electronics", MP=GRM1555C1H392GE01D, SnapEDA_Link=https://www.snapeda.com/parts/GRM1555C1H392GE01D/Murata/view-part/?ref=snap
CH_5: library part EMG_R5_CH_5, "SMD capacitor C0G(EIA) with capacitance 3900pF Tol.2%. Rated voltage 50Vdc 125C", Package="1005-2 Murata", Check_prices=https://www.snapeda.com/parts/GRM1555C1H392GE01D/Murata/view-part/?ref=eda, Controlled Revision="R5 2026-09-16; project-local frozen symbol/footprint", MF="Murata Electronics", MP=GRM1555C1H392GE01D, SnapEDA_Link=https://www.snapeda.com/parts/GRM1555C1H392GE01D/Murata/view-part/?ref=snap
CL_1: library part EMG_R5_CL_1, Manufacturer=Murata, Controlled Revision="R5 2026-09-16; project-local frozen symbol/footprint", Part Number=GRM21BR71C824KA01L
CL_2: library part EMG_R5_CL_2, Manufacturer=Murata, Controlled Revision="R5 2026-09-16; project-local frozen symbol/footprint", Part Number=GRM21BR71C824KA01L
CL_3: library part EMG_R5_CL_3, Manufacturer=Murata, Controlled Revision="R5 2026-09-16; project-local frozen symbol/footprint", Part Number=GRM21BR71C824KA01L
CL_4: library part EMG_R5_CL_4, Manufacturer=Murata, Controlled Revision="R5 2026-09-16; project-local frozen symbol/footprint", Part Number=GRM21BR71C824KA01L
CL_5: library part EMG_R5_CL_5, Manufacturer=Murata, Controlled Revision="R5 2026-09-16; project-local frozen symbol/footprint", Part Number=GRM21BR71C824KA01L
Cservo_1: library part EMG_R5_Cservo_1, "Capacitor", Capacitance="3.3 uF", Dielectric=X7R, Manufacturer=Murata, Manufacturer_Name="Murata Electronics", Mouser Part Number=81-GRM31CR71E335KA8L, Package="1206 / 3216 metric", Tolerance=+/-10%, Voltage Rating="25 V", Arrow Part Number=GRM31CR71E335KA88L, Arrow Price/Stock=https://www.arrow.com/en/products/grm31cr71e335ka88l/murata-manufacturing?region=europe, Controlled Revision="R5 2026-09-16; project-local frozen symbol/footprint", Datasheet Link=https://search.murata.co.jp/Ceramy/image/img/A01X/G101/ENG/GRM31CR71E335KA88-01.pdf, Height="1.6 +/-0.2 mm", Manufacturer Part Number=GRM31CR71E335KA88L, Manufacturer_Part_Number=GRM31CR71E335KA88L, Mouser Price/Stock=https://www.mouser.co.uk/ProductDetail/Murata-Electronics/GRM31CR71E335KA88L?qs=O9nxk9bDVAjJxWOahKXrZA%3D%3D
Cservo_2: library part EMG_R5_Cservo_2, "Capacitor", Capacitance="3.3 uF", Dielectric=X7R, Manufacturer=Murata, Manufacturer_Name="Murata Electronics", Mouser Part Number=81-GRM31CR71E335KA8L, Package="1206 / 3216 metric", Tolerance=+/-10%, Voltage Rating="25 V", Arrow Part Number=GRM31CR71E335KA88L, Arrow Price/Stock=https://www.arrow.com/en/products/grm31cr71e335ka88l/murata-manufacturing?region=europe, Controlled Revision="R5 2026-09-16; project-local frozen symbol/footprint", Datasheet Link=https://search.murata.co.jp/Ceramy/image/img/A01X/G101/ENG/GRM31CR71E335KA88-01.pdf, Height="1.6 +/-0.2 mm", Manufacturer Part Number=GRM31CR71E335KA88L, Manufacturer_Part_Number=GRM31CR71E335KA88L, Mouser Price/Stock=https://www.mouser.co.uk/ProductDetail/Murata-Electronics/GRM31CR71E335KA88L?qs=O9nxk9bDVAjJxWOahKXrZA%3D%3D
Cservo_3: library part EMG_R5_Cservo_3, "Capacitor", Capacitance="3.3 uF", Dielectric=X7R, Manufacturer=Murata, Manufacturer_Name="Murata Electronics", Mouser Part Number=81-GRM31CR71E335KA8L, Package="1206 / 3216 metric", Tolerance=+/-10%, Voltage Rating="25 V", Arrow Part Number=GRM31CR71E335KA88L, Arrow Price/Stock=https://www.arrow.com/en/products/grm31cr71e335ka88l/murata-manufacturing?region=europe, Controlled Revision="R5 2026-09-16; project-local frozen symbol/footprint", Datasheet Link=https://search.murata.co.jp/Ceramy/image/img/A01X/G101/ENG/GRM31CR71E335KA88-01.pdf, Height="1.6 +/-0.2 mm", Manufacturer Part Number=GRM31CR71E335KA88L, Manufacturer_Part_Number=GRM31CR71E335KA88L, Mouser Price/Stock=https://www.mouser.co.uk/ProductDetail/Murata-Electronics/GRM31CR71E335KA88L?qs=O9nxk9bDVAjJxWOahKXrZA%3D%3D
Cservo_4: library part EMG_R5_Cservo_4, "Capacitor", Capacitance="3.3 uF", Dielectric=X7R, Manufacturer=Murata, Manufacturer_Name="Murata Electronics", Mouser Part Number=81-GRM31CR71E335KA8L, Package="1206 / 3216 metric", Tolerance=+/-10%, Voltage Rating="25 V", Arrow Part Number=GRM31CR71E335KA88L, Arrow Price/Stock=https://www.arrow.com/en/products/grm31cr71e335ka88l/murata-manufacturing?region=europe, Controlled Revision="R5 2026-09-16; project-local frozen symbol/footprint", Datasheet Link=https://search.murata.co.jp/Ceramy/image/img/A01X/G101/ENG/GRM31CR71E335KA88-01.pdf, Height="1.6 +/-0.2 mm", Manufacturer Part Number=GRM31CR71E335KA88L, Manufacturer_Part_Number=GRM31CR71E335KA88L, Mouser Price/Stock=https://www.mouser.co.uk/ProductDetail/Murata-Electronics/GRM31CR71E335KA88L?qs=O9nxk9bDVAjJxWOahKXrZA%3D%3D
Cservo_5: library part EMG_R5_Cservo_5, "Capacitor", Capacitance="3.3 uF", Dielectric=X7R, Manufacturer=Murata, Manufacturer_Name="Murata Electronics", Mouser Part Number=81-GRM31CR71E335KA8L, Package="1206 / 3216 metric", Tolerance=+/-10%, Voltage Rating="25 V", Arrow Part Number=GRM31CR71E335KA88L, Arrow Price/Stock=https://www.arrow.com/en/products/grm31cr71e335ka88l/murata-manufacturing?region=europe, Controlled Revision="R5 2026-09-16; project-local frozen symbol/footprint", Datasheet Link=https://search.murata.co.jp/Ceramy/image/img/A01X/G101/ENG/GRM31CR71E335KA88-01.pdf, Height="1.6 +/-0.2 mm", Manufacturer Part Number=GRM31CR71E335KA88L, Manufacturer_Part_Number=GRM31CR71E335KA88L, Mouser Price/Stock=https://www.mouser.co.uk/ProductDetail/Murata-Electronics/GRM31CR71E335KA88L?qs=O9nxk9bDVAjJxWOahKXrZA%3D%3D
CU6_1: library part EMG_R5_CU6_1, "CAP CER 0.1UF 16V X5R 0402", Capacitance=100nF, Case Code (Imperial)=0402, Case Code (Metric)=1005, Dielectric=X5R, Max Operating Temperature=85°C, Min Operating Temperature=-55°C, Package Quantity=1, Tolerance=10%, Voltage=16V, Case/Package=0402, Construction=Flat, Controlled Revision="R5 2026-09-16; project-local frozen symbol/footprint", Depth=0.5mm, Height=0.5mm, Lead Free="Lead Free", Length=1mm, Mount="Surface Mount", Packaging="Tape and Reel", Radiation Hardening=No, REACH SVHC="No SVHC", RoHS Compliant=Yes, Series=GRM, Size=0.5mm, Termination=SMD/SMT, Thickness=0.022inch, Voltage Rating=16V, Voltage Rating (DC)=16V, Width=0.02inch
CU_11: library part EMG_R5_CU_11, "CAP CER 0.1UF 16V X5R 0402", Capacitance=100nF, Case Code (Imperial)=0402, Case Code (Metric)=1005, Dielectric=X5R, Max Operating Temperature=85°C, Min Operating Temperature=-55°C, Package Quantity=1, Tolerance=10%, Voltage=16V, Case/Package=0402, Construction=Flat, Controlled Revision="R5 2026-09-16; project-local frozen symbol/footprint", Depth=0.5mm, Height=0.5mm, Lead Free="Lead Free", Length=1mm, Mount="Surface Mount", Packaging="Tape and Reel", Radiation Hardening=No, REACH SVHC="No SVHC", RoHS Compliant=Yes, Series=GRM, Size=0.5mm, Termination=SMD/SMT, Thickness=0.022inch, Voltage Rating=16V, Voltage Rating (DC)=16V, Width=0.02inch
CU_12: library part EMG_R5_CU_12, "CAP CER 0.1UF 16V X5R 0402", Capacitance=100nF, Case Code (Imperial)=0402, Case Code (Metric)=1005, Dielectric=X5R, Max Operating Temperature=85°C, Min Operating Temperature=-55°C, Package Quantity=1, Tolerance=10%, Voltage=16V, Case/Package=0402, Construction=Flat, Controlled Revision="R5 2026-09-16; project-local frozen symbol/footprint", Depth=0.5mm, Height=0.5mm, Lead Free="Lead Free", Length=1mm, Mount="Surface Mount", Packaging="Tape and Reel", Radiation Hardening=No, REACH SVHC="No SVHC", RoHS Compliant=Yes, Series=GRM, Size=0.5mm, Termination=SMD/SMT, Thickness=0.022inch, Voltage Rating=16V, Voltage Rating (DC)=16V, Width=0.02inch
CU_14: library part EMG_R5_CU_14, "CAP CER 0.1UF 16V X5R 0402", Capacitance=100nF, Case Code (Imperial)=0402, Case Code (Metric)=1005, Dielectric=X5R, Max Operating Temperature=85°C, Min Operating Temperature=-55°C, Package Quantity=1, Tolerance=10%, Voltage=16V, Case/Package=0402, Construction=Flat, Controlled Revision="R5 2026-09-16; project-local frozen symbol/footprint", Depth=0.5mm, Height=0.5mm, Lead Free="Lead Free", Length=1mm, Mount="Surface Mount", Packaging="Tape and Reel", Radiation Hardening=No, REACH SVHC="No SVHC", RoHS Compliant=Yes, Series=GRM, Size=0.5mm, Termination=SMD/SMT, Thickness=0.022inch, Voltage Rating=16V, Voltage Rating (DC)=16V, Width=0.02inch
CU_21: library part EMG_R5_CU_21, "Murata GRM155C71C105KE11D: 1 uF 16 V X7S +/-10%, 0402/1005 metric", Capacitance="1 uF", Dielectric=X7S, Manufacturer=Murata, Manufacturer Part Number=GRM155C71C105KE11D, Package="0402 / 1005 metric", Tolerance=+/-10%, Voltage Rating="16 V", Check_prices=https://www.snapeda.com/parts/GRM155C71C105KE11D/Murata/view-part/?ref=eda, Controlled Revision="R5 2026-09-16; project-local frozen symbol/footprint", MF=Murata, MP=GRM155C71C105KE11D, SnapEDA_Link=https://www.snapeda.com/parts/GRM155C71C105KE11D/Murata/view-part/?ref=snap
CU_22: library part EMG_R5_CU_22, "Murata GRM155C71C105KE11D: 1 uF 16 V X7S +/-10%, 0402/1005 metric", Capacitance="1 uF", Dielectric=X7S, Manufacturer=Murata, Manufacturer Part Number=GRM155C71C105KE11D, Package="0402 / 1005 metric", Tolerance=+/-10%, Voltage Rating="16 V", Check_prices=https://www.snapeda.com/parts/GRM155C71C105KE11D/Murata/view-part/?ref=eda, Controlled Revision="R5 2026-09-16; project-local frozen symbol/footprint", MF=Murata, MP=GRM155C71C105KE11D, SnapEDA_Link=https://www.snapeda.com/parts/GRM155C71C105KE11D/Murata/view-part/?ref=snap
CU_24: library part EMG_R5_CU_24, "Murata GRM155C71C105KE11D: 1 uF 16 V X7S +/-10%, 0402/1005 metric", Capacitance="1 uF", Dielectric=X7S, Manufacturer=Murata, Manufacturer Part Number=GRM155C71C105KE11D, Package="0402 / 1005 metric", Tolerance=+/-10%, Voltage Rating="16 V", Check_prices=https://www.snapeda.com/parts/GRM155C71C105KE11D/Murata/view-part/?ref=eda, Controlled Revision="R5 2026-09-16; project-local frozen symbol/footprint", MF=Murata, MP=GRM155C71C105KE11D, SnapEDA_Link=https://www.snapeda.com/parts/GRM155C71C105KE11D/Murata/view-part/?ref=snap
CUP4: library part EMG_R5_CUP4, "Chip Multilayer Ceramic Capacitors for General Purpose, 0805, 47uF, X5R, 15%, 20%, 6.3V", Capacitance=47uF, Case Code (Imperial)=0805, Case Code (Metric)=2012, Max Operating Temperature=85°C, Min Operating Temperature=-55°C, Tolerance=20%, Voltage Rating=6.3V, Case/Package=0805, Controlled Revision="R5 2026-09-16; project-local frozen symbol/footprint", Length=0.079inch, Mount="Surface Mount", Packaging="Tape and Reel", Thickness=0.037inch, Width=0.049inch
CUP4_1: library part EMG_R5_CUP4_1, "10 µF ±10% 25V Ceramic Capacitor X7S 0805 (2012 Metric)", Controlled Revision="R5 2026-09-16; project-local frozen symbol/footprint"
CUP4_FB: library part EMG_R5_CUP4_FB, Manufacturer=Murata, Controlled Revision="R5 2026-09-16; project-local frozen symbol/footprint", Part Number=GRM1555C1H100JA01D